# EAGLE board class h (EAGLE 9.6.2)
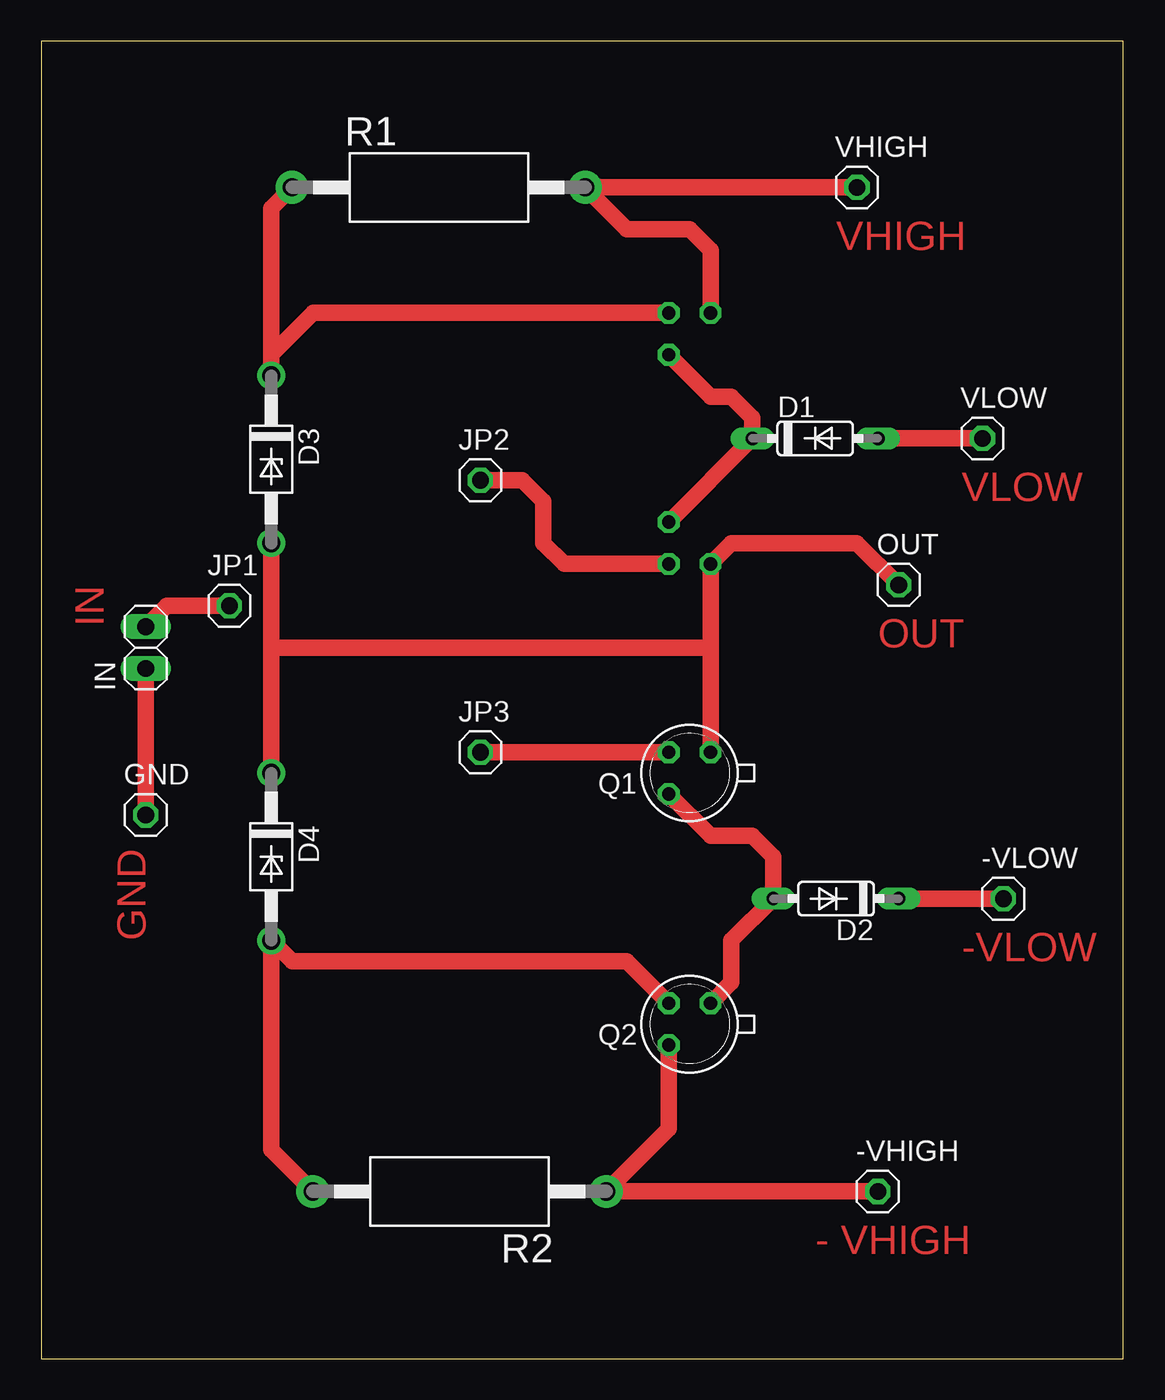
[diagram p0: board, top side]
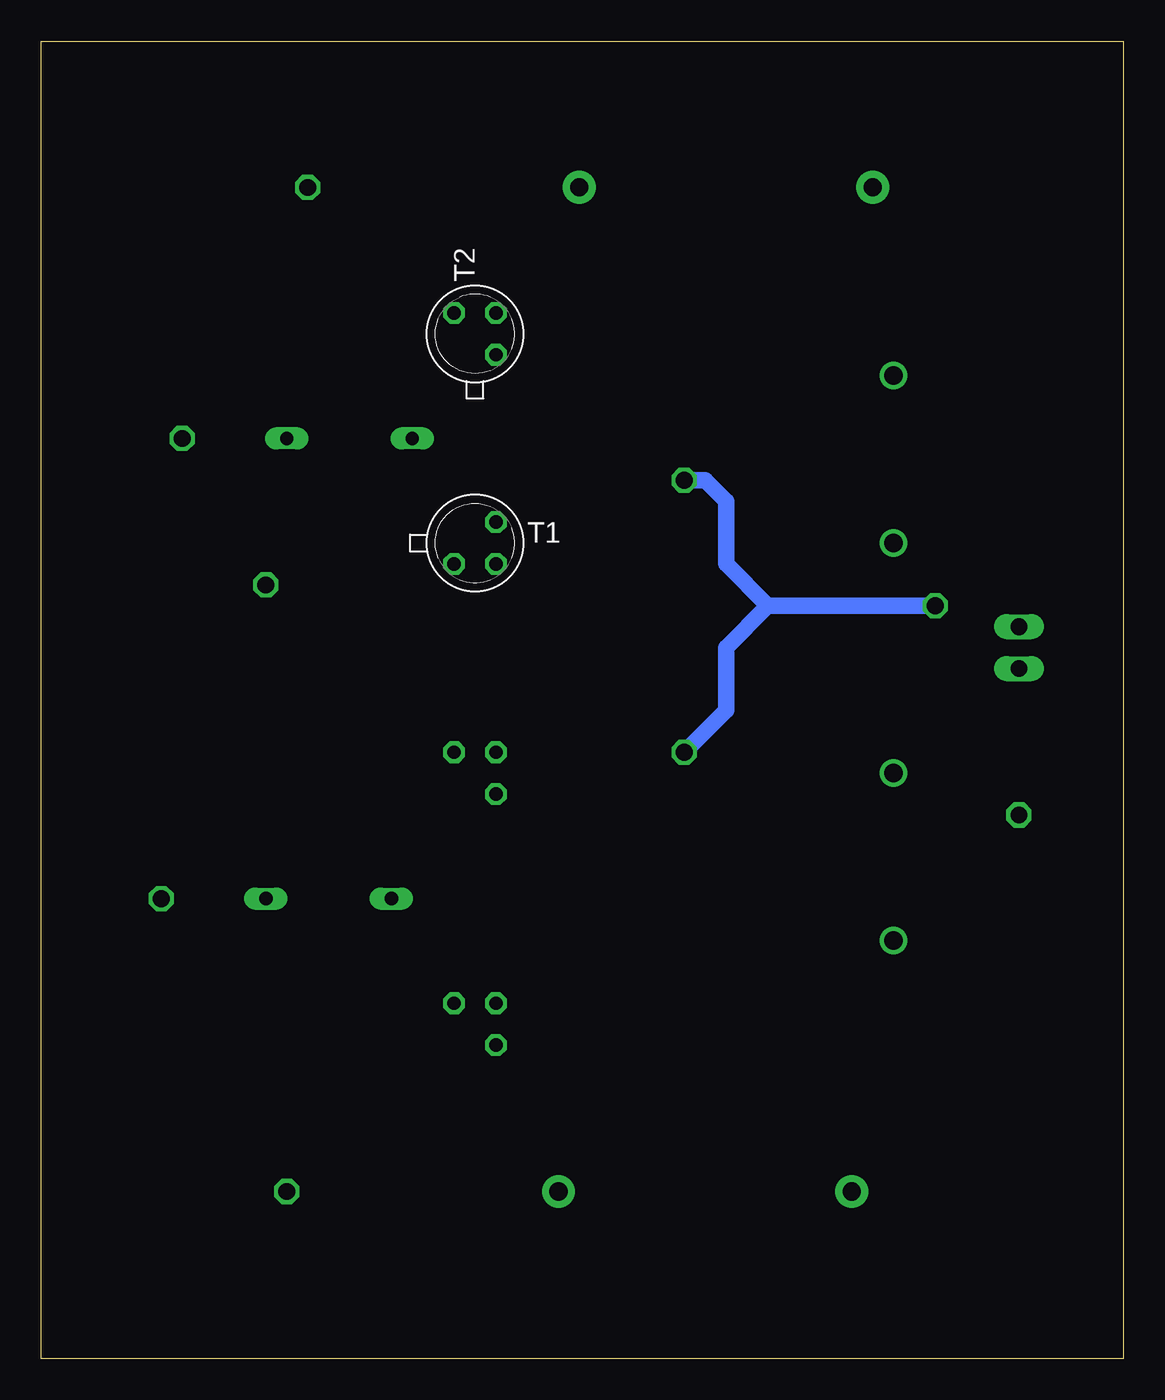
[diagram p1: board, bottom side, seen from below]

Size 65.71 x 80 mm. Coordinates in mm from the lower left corner, seen from the top.
Outline: 0,0 65.71,0 65.71,80 0,80 0,0
Copper layers (1*16): Top 0.035mm / dielectric 1.5mm / Bottom 0.035mm
Design rules "default": minimum track width 6mil, minimum drill 0.35mm, track to track 6mil, track to pad 6mil, pad to pad 6mil, via to via 6mil, smd to smd 6mil, copper to edge 40mil, drill to drill 6mil, minimum pad ring 10mil, minimum via ring 8mil, stop-mask expansion 4mil, vias tented up to drill 0mil, thermal gap 10mil

## Footprints (pad centres in the part's own frame; a part is rotated, then mirrored left to right if it is on the bottom)
1X01 = drill 1.016 octagon: 1 0,0
DO35-7 = drill 0.813 long: A 3.81,0; C -3.81,0
DO41Z10 = drill 1.118: A 5.08,0; C -5.08,0
1X02 = drill 1.016 long: 1 -1.27,0; 2 1.27,0
TO18 = drill 0.813 octagon: 1 -1.27,-1.27; 2 1.27,-1.27; 3 1.27,1.27
AC01 = drill 1.1 pad 2: 1 -8.9,0; 2 8.9,0

## Placement (x,y rotation side)
-VHIGH  [1X01]  50.8,10.16 0 top
-VLOW  [1X01]  58.42,27.94 0 top
D1  1N4148DO35-7  [DO35-7]  46.99,55.88 0 top
D2  1N4148DO35-7  [DO35-7]  48.26,27.94 180 top
D3  1N4728  [DO41Z10]  13.97,54.61 270 top
D4  1N4728  [DO41Z10]  13.97,30.48 270 top
GND  [1X01]  6.35,33.02 0 top
IN  [1X02]  6.35,43.18 90 top
JP1  [1X01]  11.43,45.72 0 top
JP2  [1X01]  26.67,53.34 0 top
JP3  [1X01]  26.67,36.83 0 top
OUT  [1X01]  52.07,46.99 0 top
Q1  2N2907  [TO18]  39.37,35.56 180 top
Q2  2N2907  [TO18]  39.37,20.32 180 top
R1  [AC01]  24.13,71.12 0 top
R2  [AC01]  25.4,10.16 180 top
T1  2N2222  [TO18]  39.37,49.53 0 bottom
T2  2N2222  [TO18]  39.37,62.23 90 bottom
VHIGH  [1X01]  49.53,71.12 0 top
VLOW  [1X01]  57.15,55.88 0 top

## Library data of the parts
-VHIGH -VLOW GND IN JP1-JP3 OUT VHIGH VLOW = pinhead
D1-D4 = diode
Q1 Q2 = transistor-pnp
R1 R2 = resistor-power; OC_FARNELL: unknown; OC_NEWARK: unknown
T1 T2 = transistor

## Nets
GND: GND.1 IN.1
N$1: D3.C R1.1 T2.2
N$2: IN.2 JP1.1 JP2.1 JP3.1 Q1.2 T1.2
N$3: D1.A VLOW.1
N$4: D3.A D4.C OUT.1 Q1.1 T1.1
N$5: D1.C T1.3 T2.1
N$6: D2.A Q1.3 Q2.1
N$7: -VHIGH.1 Q2.3 R2.1
N$8: R1.2 T2.3 VHIGH.1
N$9: D4.A Q2.2 R2.2
N$10: -VLOW.1 D2.C

## Tracks (layer width: path | path; a pad name or v marks a point on that pad's centre or on a via)
GND
  Top 1.016: IN.1 GND.1
N$1
  Top 1.016: R1.1 13.97,69.86 D3.C 13.97,60.96 16.51,63.5 T2.2
N$2
  Top 1.016: IN.2 7.62,45.72 JP1.1 | JP2.1 29.21,53.34 30.48,52.07 30.48,49.53 31.75,48.26 T1.2 | JP3.1 Q1.2
  Bottom 1.016: JP1.1 21.59,45.72 | 21.59,45.72 24.13,48.26 24.13,52.07 25.4,53.34 JP2.1 | 21.59,45.72 24.13,43.18 24.13,39.37 JP3.1
N$3
  Top 1.016: VLOW.1 D1.A
N$4
  Top 1.016: D4.C 13.97,43.18 | 13.97,43.18 D3.A | Q1.1 40.64,43.18 | 13.97,43.18 40.64,43.18 | 40.64,43.18 T1.1 41.91,49.53 49.53,49.53 OUT.1
N$5
  Top 1.016: T2.1 40.64,58.42 41.91,58.42 43.18,57.15 D1.C T1.3
N$6
  Top 1.016: Q1.3 40.64,31.75 43.18,31.75 44.45,30.48 D2.A 41.91,25.4 41.91,22.86 Q2.1
N$7
  Top 1.016: -VHIGH.1 R2.1 38.1,13.96 Q2.3
N$8
  Top 1.016: VHIGH.1 R1.2 35.56,68.58 39.37,68.58 40.64,67.31 T2.3
N$9
  Top 1.016: R2.2 13.97,12.69 D4.A 15.24,24.13 35.56,24.13 Q2.2
N$10
  Top 1.016: D2.C -VLOW.1

## Text on the board
Top: VHIGH | VLOW | IN | OUT | GND | -VLOW | - VHIGH